# EAGLE board output (EAGLE 6.2)
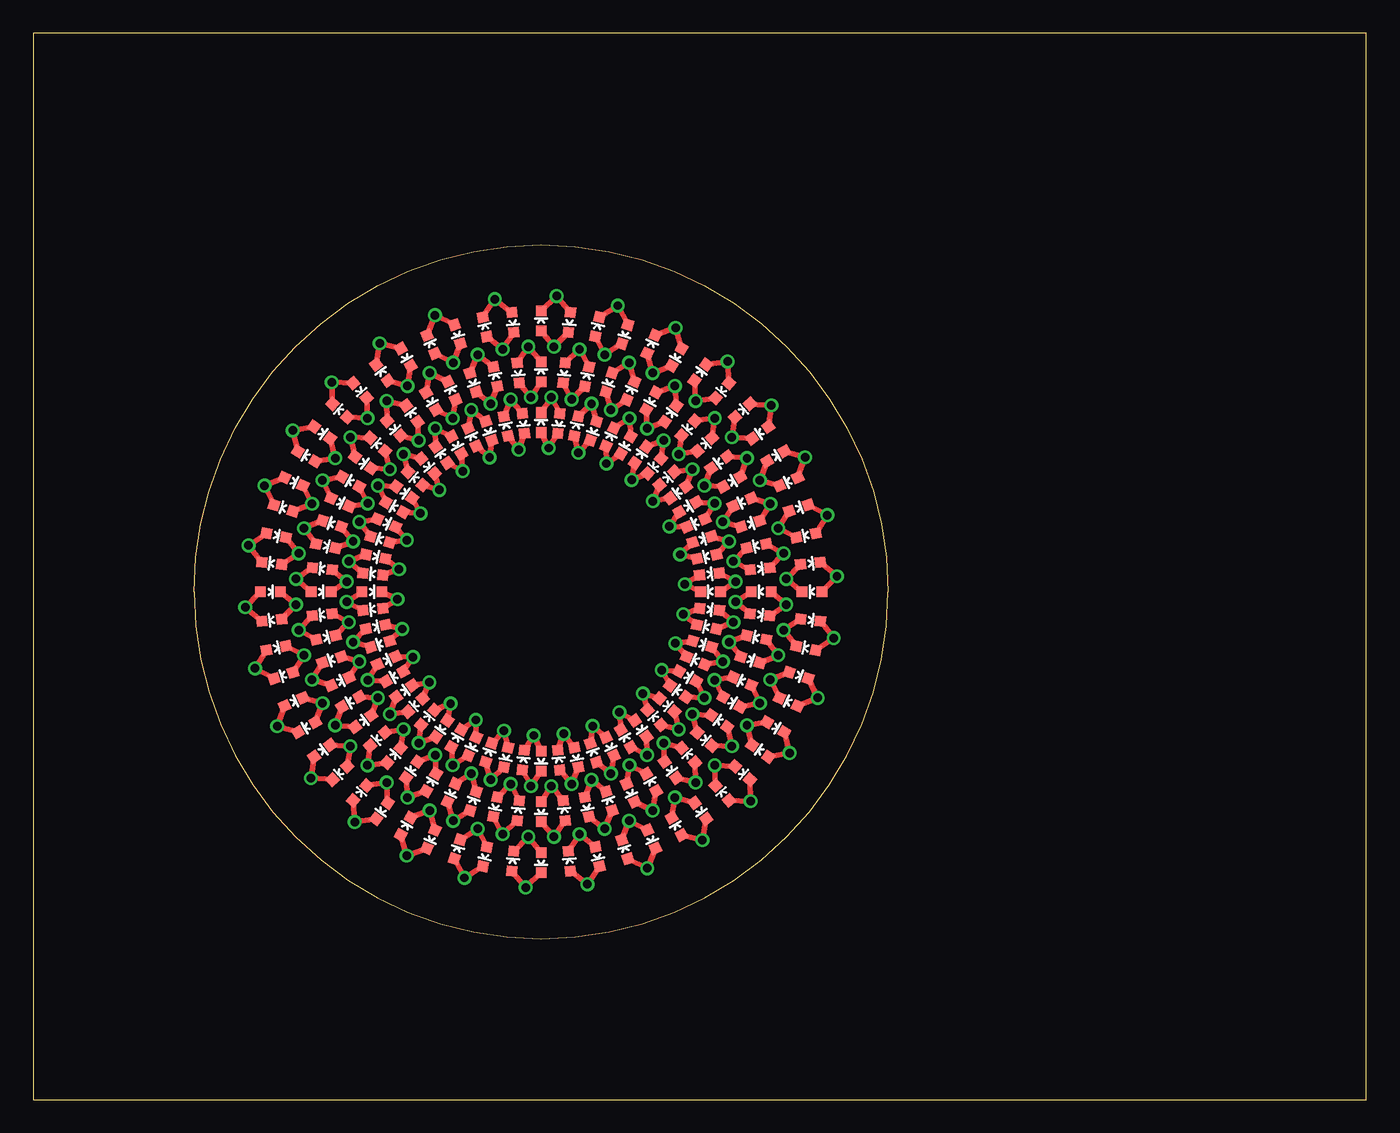
[diagram p0: board, top side]
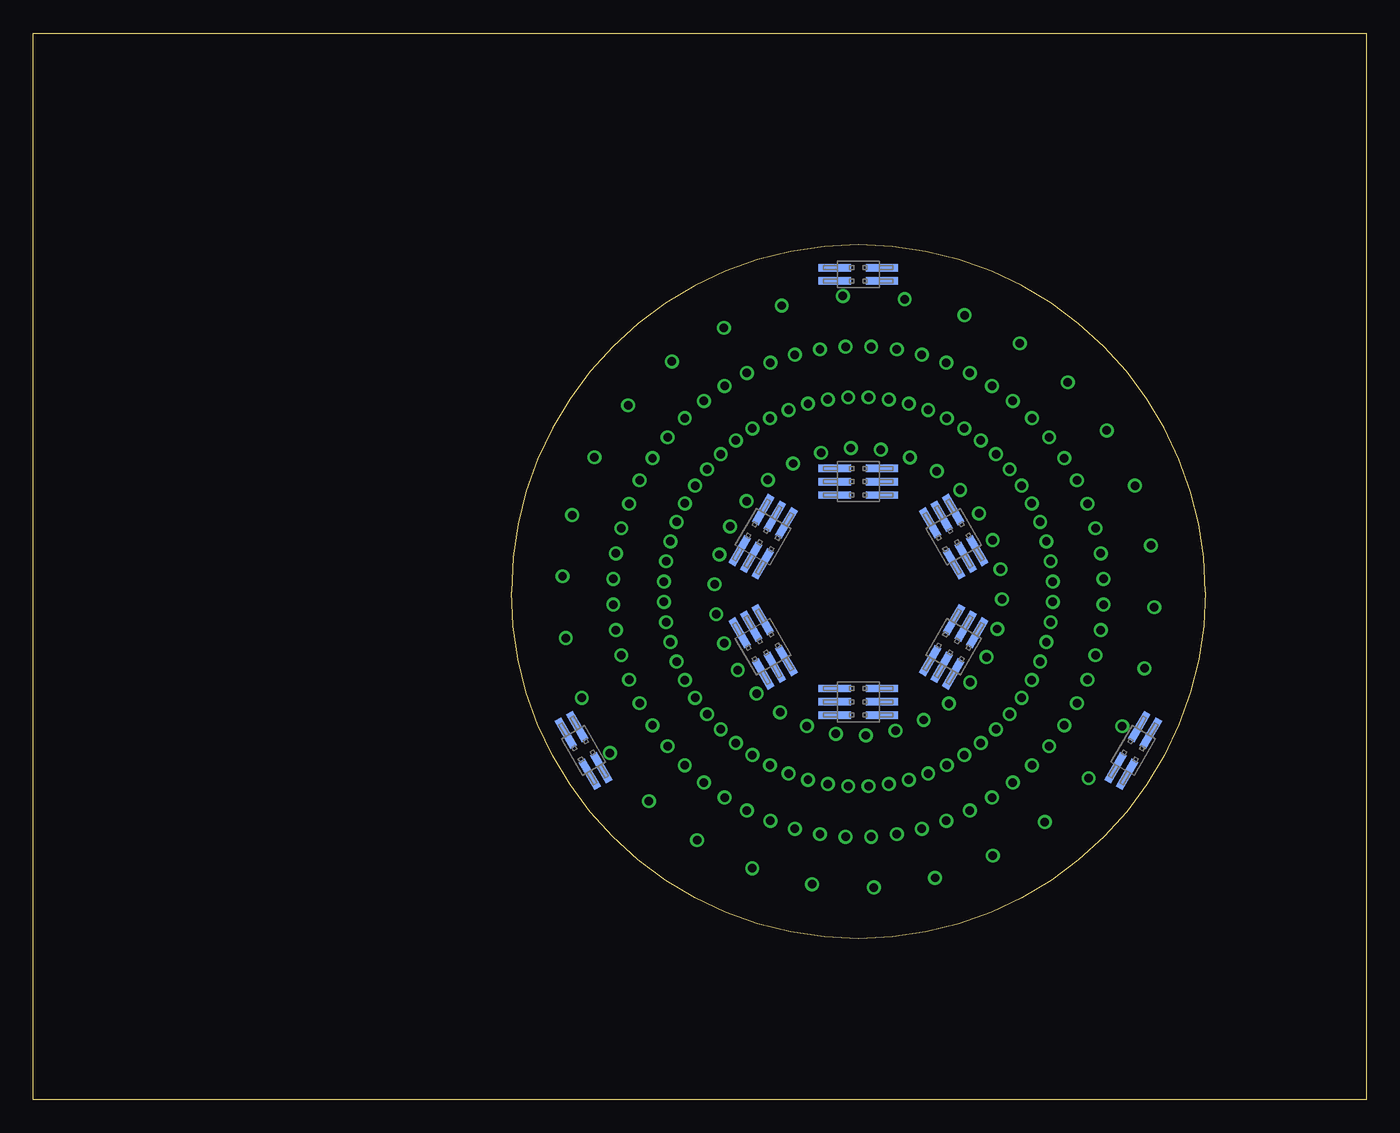
[diagram p1: board, bottom side, seen from below]

Size 100 x 80 mm. Coordinates in mm from the lower left corner, seen from the top.
Outline: 0,0 100,0 100,80 0,80 0,0
Outline: 12.06,38.1 arc180 64.14,38.1 arc180 12.06,38.1
Copper layers (1*16): Top 0.035mm / dielectric 1.5mm / Bottom 0.035mm
Design rules: minimum track width 10mil, minimum drill 24mil, track to track 8mil, track to pad 8mil, pad to pad 8mil, via to via 8mil, smd to smd 8mil, copper to edge 40mil, drill to drill 8mil, minimum pad ring 10mil, minimum via ring 8mil, stop-mask expansion 4mil, vias tented up to drill 0mil, thermal gap 10mil

## Footprints (pad centres in the part's own frame; a part is rotated, then mirrored left to right if it is on the bottom)
3X2_1MM_SMD = smd 2.413 x 0.559: P1 -1.778,1; P2 -1.778,0; P3 -1.778,-1; P4 1.778,-1; P5 1.778,0; P6 1.778,1
2X2_1MM_SMD = smd 2.413 x 0.559: P1 -1.778,0.5; P2 -1.778,-0.5; P3 1.778,-0.5; P4 1.778,0.5
LED-0603 = smd 0.8 x 0.8: A 0,-0.75; C 0,0.75

## Placement (x,y rotation side)
H1  2X3  [3X2_1MM_SMD]  38.1,46.35 0 bottom
H2  2X3  [3X2_1MM_SMD]  45.25,42.23 60 bottom
H3  2X3  [3X2_1MM_SMD]  45.25,33.97 120 bottom
H4  2X3  [3X2_1MM_SMD]  38.1,29.84 180 bottom
H5  2X3  [3X2_1MM_SMD]  30.95,33.97 240 bottom
H6  2X3  [3X2_1MM_SMD]  30.95,42.23 300 bottom
H7  2X2  [2X2_1MM_SMD]  38.1,61.91 180 bottom
H8  2X2  [2X2_1MM_SMD]  58.72,26.19 300 bottom
H9  2X2  [2X2_1MM_SMD]  17.48,26.19 60 bottom
LED1  RED  [LED-0603]  38.1,50.8 0 top
LED2  RED  [LED-0603]  39.43,50.73 174 top
LED3  RED  [LED-0603]  40.74,50.52 348 top
LED4  RED  [LED-0603]  42.02,50.18 162 top
LED5  RED  [LED-0603]  43.27,49.7 336 top
LED6  RED  [LED-0603]  44.45,49.1 150 top
LED7  RED  [LED-0603]  45.56,48.37 324 top
LED8  RED  [LED-0603]  46.6,47.54 138 top
LED9  RED  [LED-0603]  47.54,46.6 312 top
LED10  RED  [LED-0603]  48.37,45.56 126 top
LED11  RED  [LED-0603]  49.1,44.45 300 top
LED12  RED  [LED-0603]  49.7,43.27 114 top
LED13  RED  [LED-0603]  50.18,42.02 288 top
LED14  RED  [LED-0603]  50.52,40.74 102 top
LED15  RED  [LED-0603]  50.73,39.43 276 top
LED16  RED  [LED-0603]  50.8,38.1 90 top
LED17  RED  [LED-0603]  50.73,36.77 264 top
LED18  RED  [LED-0603]  50.52,35.46 78 top
LED19  RED  [LED-0603]  50.18,34.18 252 top
LED20  RED  [LED-0603]  49.7,32.93 66 top
LED21  RED  [LED-0603]  49.1,31.75 240 top
LED22  RED  [LED-0603]  48.37,30.64 54 top
LED23  RED  [LED-0603]  47.54,29.6 228 top
LED24  RED  [LED-0603]  46.6,28.66 42 top
LED25  RED  [LED-0603]  45.56,27.83 216 top
LED26  RED  [LED-0603]  44.45,27.1 30 top
LED27  RED  [LED-0603]  43.27,26.5 204 top
LED28  RED  [LED-0603]  42.02,26.02 18 top
LED29  RED  [LED-0603]  40.74,25.68 192 top
LED30  RED  [LED-0603]  39.43,25.47 6 top
LED31  RED  [LED-0603]  38.1,25.4 180 top
LED32  RED  [LED-0603]  36.77,25.47 354 top
LED33  RED  [LED-0603]  35.46,25.68 168 top
LED34  RED  [LED-0603]  34.18,26.02 342 top
LED35  RED  [LED-0603]  32.93,26.5 156 top
LED36  RED  [LED-0603]  31.75,27.1 330 top
LED37  RED  [LED-0603]  30.64,27.83 144 top
LED38  RED  [LED-0603]  29.6,28.66 318 top
LED39  RED  [LED-0603]  28.66,29.6 132 top
LED40  RED  [LED-0603]  27.83,30.64 306 top
LED41  RED  [LED-0603]  27.1,31.75 120 top
LED42  RED  [LED-0603]  26.5,32.93 294 top
LED43  RED  [LED-0603]  26.02,34.18 108 top
LED44  RED  [LED-0603]  25.68,35.46 282 top
LED45  RED  [LED-0603]  25.47,36.77 96 top
LED46  RED  [LED-0603]  25.4,38.1 270 top
LED47  RED  [LED-0603]  25.47,39.43 84 top
LED48  RED  [LED-0603]  25.68,40.74 258 top
LED49  RED  [LED-0603]  26.02,42.02 72 top
LED50  RED  [LED-0603]  26.5,43.27 246 top
LED51  RED  [LED-0603]  27.1,44.45 60 top
LED52  RED  [LED-0603]  27.83,45.56 234 top
LED53  RED  [LED-0603]  28.66,46.6 48 top
LED54  RED  [LED-0603]  29.6,47.54 222 top
LED55  RED  [LED-0603]  30.64,48.37 36 top
LED56  RED  [LED-0603]  31.75,49.1 210 top
LED57  RED  [LED-0603]  32.93,49.7 24 top
LED58  RED  [LED-0603]  34.18,50.18 198 top
LED59  RED  [LED-0603]  35.46,50.52 12 top
LED60  RED  [LED-0603]  36.77,50.73 186 top
LED61  GREEN  [LED-0603]  38.1,54.61 0 top
LED62  GREEN  [LED-0603]  39.83,54.52 174 top
LED63  GREEN  [LED-0603]  41.53,54.25 348 top
LED64  GREEN  [LED-0603]  43.2,53.8 162 top
LED65  GREEN  [LED-0603]  44.82,53.18 336 top
LED66  GREEN  [LED-0603]  46.35,52.4 150 top
LED67  GREEN  [LED-0603]  47.8,51.46 324 top
LED68  GREEN  [LED-0603]  49.15,50.37 138 top
LED69  GREEN  [LED-0603]  50.37,49.15 312 top
LED70  GREEN  [LED-0603]  51.46,47.8 126 top
LED71  GREEN  [LED-0603]  52.4,46.35 300 top
LED72  GREEN  [LED-0603]  53.18,44.82 114 top
LED73  GREEN  [LED-0603]  53.8,43.2 288 top
LED74  GREEN  [LED-0603]  54.25,41.53 102 top
LED75  GREEN  [LED-0603]  54.52,39.83 276 top
LED76  GREEN  [LED-0603]  54.61,38.1 90 top
LED77  GREEN  [LED-0603]  54.52,36.37 264 top
LED78  GREEN  [LED-0603]  54.25,34.67 78 top
LED79  GREEN  [LED-0603]  53.8,33 252 top
LED80  GREEN  [LED-0603]  53.18,31.38 66 top
LED81  GREEN  [LED-0603]  52.4,29.84 240 top
LED82  GREEN  [LED-0603]  51.46,28.4 54 top
LED83  GREEN  [LED-0603]  50.37,27.05 228 top
LED84  GREEN  [LED-0603]  49.15,25.83 42 top
LED85  GREEN  [LED-0603]  47.8,24.74 216 top
LED86  GREEN  [LED-0603]  46.35,23.8 30 top
LED87  GREEN  [LED-0603]  44.82,23.02 204 top
LED88  GREEN  [LED-0603]  43.2,22.4 18 top
LED89  GREEN  [LED-0603]  41.53,21.95 192 top
LED90  GREEN  [LED-0603]  39.83,21.68 6 top
LED91  GREEN  [LED-0603]  38.1,21.59 180 top
LED92  GREEN  [LED-0603]  36.37,21.68 354 top
LED93  GREEN  [LED-0603]  34.67,21.95 168 top
LED94  GREEN  [LED-0603]  33,22.4 342 top
LED95  GREEN  [LED-0603]  31.38,23.02 156 top
LED96  GREEN  [LED-0603]  29.84,23.8 330 top
LED97  GREEN  [LED-0603]  28.4,24.74 144 top
LED98  GREEN  [LED-0603]  27.05,25.83 318 top
LED99  GREEN  [LED-0603]  25.83,27.05 132 top
LED100  GREEN  [LED-0603]  24.74,28.4 306 top
LED101  GREEN  [LED-0603]  23.8,29.84 120 top
LED102  GREEN  [LED-0603]  23.02,31.38 294 top
LED103  GREEN  [LED-0603]  22.4,33 108 top
LED104  GREEN  [LED-0603]  21.95,34.67 282 top
LED105  GREEN  [LED-0603]  21.68,36.37 96 top
LED106  GREEN  [LED-0603]  21.59,38.1 270 top
LED107  GREEN  [LED-0603]  21.68,39.83 84 top
LED108  GREEN  [LED-0603]  21.95,41.53 258 top
LED109  GREEN  [LED-0603]  22.4,43.2 72 top
LED110  GREEN  [LED-0603]  23.02,44.82 246 top
LED111  GREEN  [LED-0603]  23.8,46.35 60 top
LED112  GREEN  [LED-0603]  24.74,47.8 234 top
LED113  GREEN  [LED-0603]  25.83,49.15 48 top
LED114  GREEN  [LED-0603]  27.05,50.37 222 top
LED115  GREEN  [LED-0603]  28.4,51.46 36 top
LED116  GREEN  [LED-0603]  29.84,52.4 210 top
LED117  GREEN  [LED-0603]  31.38,53.18 24 top
LED118  GREEN  [LED-0603]  33,53.8 198 top
LED119  GREEN  [LED-0603]  34.67,54.25 12 top
LED120  GREEN  [LED-0603]  36.37,54.52 186 top
LED121  BLUE  [LED-0603]  38.1,58.42 0 top
LED122  BLUE  [LED-0603]  40.22,58.31 174 top
LED123  BLUE  [LED-0603]  42.32,57.98 348 top
LED124  BLUE  [LED-0603]  44.38,57.43 162 top
LED125  BLUE  [LED-0603]  46.36,56.66 336 top
LED126  BLUE  [LED-0603]  48.26,55.7 150 top
LED127  BLUE  [LED-0603]  50.04,54.54 324 top
LED128  BLUE  [LED-0603]  51.7,53.2 138 top
LED129  BLUE  [LED-0603]  53.2,51.7 312 top
LED130  BLUE  [LED-0603]  54.54,50.04 126 top
LED131  BLUE  [LED-0603]  55.7,48.26 300 top
LED132  BLUE  [LED-0603]  56.66,46.36 114 top
LED133  BLUE  [LED-0603]  57.43,44.38 288 top
LED134  BLUE  [LED-0603]  57.98,42.32 102 top
LED135  BLUE  [LED-0603]  58.31,40.22 276 top
LED136  BLUE  [LED-0603]  58.42,38.1 90 top
LED137  BLUE  [LED-0603]  58.31,35.98 264 top
LED138  BLUE  [LED-0603]  57.98,33.88 78 top
LED139  BLUE  [LED-0603]  57.43,31.82 252 top
LED140  BLUE  [LED-0603]  56.66,29.84 66 top
LED141  BLUE  [LED-0603]  55.7,27.94 240 top
LED142  BLUE  [LED-0603]  54.54,26.16 54 top
LED143  BLUE  [LED-0603]  53.2,24.5 228 top
LED144  BLUE  [LED-0603]  51.7,23 42 top
LED145  BLUE  [LED-0603]  50.04,21.66 216 top
LED146  BLUE  [LED-0603]  48.26,20.5 30 top
LED147  BLUE  [LED-0603]  46.36,19.54 204 top
LED148  BLUE  [LED-0603]  44.38,18.77 18 top
LED149  BLUE  [LED-0603]  42.32,18.22 192 top
LED150  BLUE  [LED-0603]  40.22,17.89 6 top
LED151  BLUE  [LED-0603]  38.1,17.78 180 top
LED152  BLUE  [LED-0603]  35.98,17.89 354 top
LED153  BLUE  [LED-0603]  33.88,18.22 168 top
LED154  BLUE  [LED-0603]  31.82,18.77 342 top
LED155  BLUE  [LED-0603]  29.84,19.54 156 top
LED156  BLUE  [LED-0603]  27.94,20.5 330 top
LED157  BLUE  [LED-0603]  26.16,21.66 144 top
LED158  BLUE  [LED-0603]  24.5,23 318 top
LED159  BLUE  [LED-0603]  23,24.5 132 top
LED160  BLUE  [LED-0603]  21.66,26.16 306 top
LED161  BLUE  [LED-0603]  20.5,27.94 120 top
LED162  BLUE  [LED-0603]  19.54,29.84 294 top
LED163  BLUE  [LED-0603]  18.77,31.82 108 top
LED164  BLUE  [LED-0603]  18.22,33.88 282 top
LED165  BLUE  [LED-0603]  17.89,35.98 96 top
LED166  BLUE  [LED-0603]  17.78,38.1 270 top
LED167  BLUE  [LED-0603]  17.89,40.22 84 top
LED168  BLUE  [LED-0603]  18.22,42.32 258 top
LED169  BLUE  [LED-0603]  18.77,44.38 72 top
LED170  BLUE  [LED-0603]  19.54,46.36 246 top
LED171  BLUE  [LED-0603]  20.5,48.26 60 top
LED172  BLUE  [LED-0603]  21.66,50.04 234 top
LED173  BLUE  [LED-0603]  23,51.7 48 top
LED174  BLUE  [LED-0603]  24.5,53.2 222 top
LED175  BLUE  [LED-0603]  26.16,54.54 36 top
LED176  BLUE  [LED-0603]  27.94,55.7 210 top
LED177  BLUE  [LED-0603]  29.84,56.66 24 top
LED178  BLUE  [LED-0603]  31.82,57.43 198 top
LED179  BLUE  [LED-0603]  33.88,57.98 12 top
LED180  BLUE  [LED-0603]  35.98,58.31 186 top

## Library data of the parts
H1-H9 LED1-LED180 = Customs

## Nets
N$1: LED1.A LED2.C
N$2: LED3.A LED4.C
N$3: LED5.A LED6.C
N$4: LED7.A LED8.C
N$5: LED9.A LED10.C
N$6: LED11.A LED12.C
N$7: LED13.A LED14.C
N$8: LED15.A LED16.C
N$9: LED17.A LED18.C
N$10: LED19.A LED20.C
N$11: LED21.A LED22.C
N$12: LED23.A LED24.C
N$13: LED25.A LED26.C
N$14: LED27.A LED28.C
N$15: LED29.A LED30.C
N$16: LED31.A LED32.C
N$17: LED33.A LED34.C
N$18: LED35.A LED36.C
N$19: LED37.A LED38.C
N$20: LED39.A LED40.C
N$21: LED41.A LED42.C
N$22: LED43.A LED44.C
N$23: LED45.A LED46.C
N$24: LED47.A LED48.C
N$25: LED49.A LED50.C
N$26: LED51.A LED52.C
N$27: LED53.A LED54.C
N$28: LED55.A LED56.C
N$29: LED57.A LED58.C
N$30: LED59.A LED60.C
N$31: LED62.C LED63.A
N$32: LED64.C LED65.A
N$33: LED66.C LED67.A
N$34: LED68.C LED69.A
N$35: LED70.C LED71.A
N$36: LED72.C LED73.A
N$37: LED74.C LED75.A
N$38: LED76.C LED77.A
N$39: LED78.C LED79.A
N$40: LED80.C LED81.A
N$41: LED82.C LED83.A
N$42: LED84.C LED85.A
N$43: LED86.C LED87.A
N$44: LED88.C LED89.A
N$45: LED90.C LED91.A
N$46: LED92.C LED93.A
N$47: LED94.C LED95.A
N$48: LED96.C LED97.A
N$49: LED98.C LED99.A
N$50: LED100.C LED101.A
N$51: LED102.C LED103.A
N$52: LED104.C LED105.A
N$53: LED106.C LED107.A
N$54: LED108.C LED109.A
N$55: LED110.C LED111.A
N$56: LED112.C LED113.A
N$57: LED114.C LED115.A
N$58: LED116.C LED117.A
N$59: LED118.C LED119.A
N$60: LED61.A LED120.C
N$61: LED121.A LED122.C
N$62: LED123.A LED124.C
N$63: LED125.A LED126.C
N$64: LED127.A LED128.C
N$65: LED129.A LED130.C
N$66: LED131.A LED132.C
N$67: LED133.A LED134.C
N$68: LED135.A LED136.C
N$69: LED137.A LED138.C
N$70: LED139.A LED140.C
N$71: LED141.A LED142.C
N$72: LED143.A LED144.C
N$73: LED145.A LED146.C
N$74: LED147.A LED148.C
N$75: LED149.A LED150.C
N$76: LED151.A LED152.C
N$77: LED153.A LED154.C
N$78: LED155.A LED156.C
N$79: LED157.A LED158.C
N$80: LED159.A LED160.C
N$81: LED161.A LED162.C
N$82: LED163.A LED164.C
N$83: LED165.A LED166.C
N$84: LED167.A LED168.C
N$85: LED169.A LED170.C
N$86: LED171.A LED172.C
N$87: LED173.A LED174.C
N$88: LED175.A LED176.C
N$89: LED177.A LED178.C
N$90: LED179.A LED180.C
N$91: LED1.C LED2.A
N$92: LED3.C LED4.A
N$93: LED5.C LED6.A
N$94: LED7.C LED8.A
N$95: LED9.C LED10.A
N$96: LED11.C LED12.A
N$97: LED13.C LED14.A
N$98: LED15.C LED16.A
N$99: LED17.C LED18.A
N$100: LED19.C LED20.A
N$101: LED21.C LED22.A
N$102: LED23.C LED24.A
N$103: LED25.C LED26.A
N$104: LED27.C LED28.A
N$105: LED29.C LED30.A
N$106: LED31.C LED32.A
N$107: LED33.C LED34.A
N$108: LED35.C LED36.A
N$109: LED37.C LED38.A
N$110: LED39.C LED40.A
N$111: LED41.C LED42.A
N$112: LED43.C LED44.A
N$113: LED45.C LED46.A
N$114: LED47.C LED48.A
N$115: LED49.C LED50.A
N$116: LED51.C LED52.A
N$117: LED53.C LED54.A
N$118: LED55.C LED56.A
N$119: LED57.C LED58.A
N$120: LED59.C LED60.A
N$121: LED62.A LED63.C
N$122: LED64.A LED65.C
N$123: LED66.A LED67.C
N$124: LED68.A LED69.C
N$125: LED70.A LED71.C
N$126: LED72.A LED73.C
N$127: LED74.A LED75.C
N$128: LED76.A LED77.C
N$129: LED78.A LED79.C
N$130: LED80.A LED81.C
N$131: LED82.A LED83.C
N$132: LED84.A LED85.C
N$133: LED86.A LED87.C
N$134: LED88.A LED89.C
N$135: LED90.A LED91.C
N$136: LED92.A LED93.C
N$137: LED94.A LED95.C
N$138: LED96.A LED97.C
N$139: LED98.A LED99.C
N$140: LED100.A LED101.C
N$141: LED102.A LED103.C
N$142: LED104.A LED105.C
N$143: LED106.A LED107.C
N$144: LED108.A LED109.C
N$145: LED110.A LED111.C
N$146: LED112.A LED113.C
N$147: LED114.A LED115.C
N$148: LED116.A LED117.C
N$149: LED118.A LED119.C
N$150: LED61.C LED120.A
N$151: LED121.C LED122.A
N$152: LED123.C LED124.A
N$153: LED125.C LED126.A
N$154: LED127.C LED128.A
N$155: LED129.C LED130.A
N$156: LED131.C LED132.A
N$157: LED133.C LED134.A
N$158: LED135.C LED136.A
N$159: LED137.C LED138.A
N$160: LED139.C LED140.A
N$161: LED141.C LED142.A
N$162: LED143.C LED144.A
N$163: LED145.C LED146.A
N$164: LED147.C LED148.A
N$165: LED149.C LED150.A
N$166: LED151.C LED152.A
N$167: LED153.C LED154.A
N$168: LED155.C LED156.A
N$169: LED157.C LED158.A
N$170: LED159.C LED160.A
N$171: LED161.C LED162.A
N$172: LED163.C LED164.A
N$173: LED165.C LED166.A
N$174: LED167.C LED168.A
N$175: LED169.C LED170.A
N$176: LED171.C LED172.A
N$177: LED173.C LED174.A
N$178: LED175.C LED176.A
N$179: LED177.C LED178.A
N$180: LED179.C LED180.A

## Tracks (layer width: path | path; a pad name or v marks a point on that pad's centre or on a via)
N$1  (via drill 0.64)
  Top 0.406: LED1.A v38.66,48.88 LED2.C
N$2  (via drill 0.64)
  Top 0.406: LED3.A v40.89,48.53 LED4.C
N$3  (via drill 0.64)
  Top 0.406: LED5.A v43,47.72 LED6.C
N$4  (via drill 0.64)
  Top 0.406: LED7.A v44.89,46.49 LED8.C
N$5  (via drill 0.64)
  Top 0.406: LED9.A v46.49,44.89 LED10.C
N$6  (via drill 0.64)
  Top 0.406: LED11.A v47.72,43 LED12.C
N$7  (via drill 0.64)
  Top 0.406: LED13.A v48.53,40.89 LED14.C
N$8  (via drill 0.64)
  Top 0.406: LED15.A v48.88,38.66 LED16.C
N$9  (via drill 0.64)
  Top 0.406: LED17.A v48.76,36.41 LED18.C
N$10  (via drill 0.64)
  Top 0.406: LED19.A v48.18,34.23 LED20.C
N$11  (via drill 0.64)
  Top 0.406: LED21.A v47.15,32.22 LED22.C
N$12  (via drill 0.64)
  Top 0.406: LED23.A v45.73,30.47 LED24.C
N$13  (via drill 0.64)
  Top 0.406: LED25.A v43.98,29.05 LED26.C
N$14  (via drill 0.64)
  Top 0.406: LED27.A v41.97,28.02 LED28.C
N$15  (via drill 0.64)
  Top 0.406: LED29.A v39.79,27.44 LED30.C
N$16  (via drill 0.64)
  Top 0.406: LED31.A v37.53,27.32 LED32.C
N$17  (via drill 0.64)
  Top 0.406: LED33.A v35.31,27.67 LED34.C
N$18  (via drill 0.64)
  Top 0.406: LED35.A v33.2,28.48 LED36.C
N$19  (via drill 0.64)
  Top 0.406: LED37.A v31.31,29.71 LED38.C
N$20  (via drill 0.64)
  Top 0.406: LED39.A v29.71,31.31 LED40.C
N$21  (via drill 0.64)
  Top 0.406: LED41.A v28.48,33.2 LED42.C
N$22  (via drill 0.64)
  Top 0.406: LED43.A v27.67,35.31 LED44.C
N$23  (via drill 0.64)
  Top 0.406: LED45.A v27.32,37.53 LED46.C
N$24  (via drill 0.64)
  Top 0.406: LED47.A v27.44,39.79 LED48.C
N$25  (via drill 0.64)
  Top 0.406: LED49.A v28.02,41.97 LED50.C
N$26  (via drill 0.64)
  Top 0.406: LED51.A v29.05,43.98 LED52.C
N$27  (via drill 0.64)
  Top 0.406: LED53.A v30.47,45.73 LED54.C
N$28  (via drill 0.64)
  Top 0.406: LED55.A v32.22,47.15 LED56.C
N$29  (via drill 0.64)
  Top 0.406: LED57.A v34.23,48.18 LED58.C
N$30  (via drill 0.64)
  Top 0.406: LED59.A v36.41,48.76 LED60.C
N$31  (via drill 0.64)
  Top 0.406: LED62.C v40.38,52.52 LED63.A
N$32  (via drill 0.64)
  Top 0.406: LED64.C v43.33,51.73 LED65.A
N$33  (via drill 0.64)
  Top 0.406: LED66.C v46.05,50.35 LED67.A
N$34  (via drill 0.64)
  Top 0.406: LED68.C v48.43,48.43 LED69.A
N$35  (via drill 0.64)
  Top 0.406: LED70.C v50.35,46.05 LED71.A
N$36  (via drill 0.64)
  Top 0.406: LED72.C v51.73,43.33 LED73.A
N$37  (via drill 0.64)
  Top 0.406: LED74.C v52.52,40.38 LED75.A
N$38  (via drill 0.64)
  Top 0.406: LED76.C v52.69,37.34 LED77.A
N$39  (via drill 0.64)
  Top 0.406: LED78.C v52.21,34.32 LED79.A
N$40  (via drill 0.64)
  Top 0.406: LED80.C v51.11,31.47 LED81.A
N$41  (via drill 0.64)
  Top 0.406: LED82.C v49.45,28.91 LED83.A
N$42  (via drill 0.64)
  Top 0.406: LED84.C v47.29,26.75 LED85.A
N$43  (via drill 0.64)
  Top 0.406: LED86.C v44.73,25.09 LED87.A
N$44  (via drill 0.64)
  Top 0.406: LED88.C v41.88,23.99 LED89.A
N$45  (via drill 0.64)
  Top 0.406: LED90.C v38.86,23.52 LED91.A
N$46  (via drill 0.64)
  Top 0.406: LED92.C v35.81,23.68 LED93.A
N$47  (via drill 0.64)
  Top 0.406: LED94.C v32.87,24.46 LED95.A
N$48  (via drill 0.64)
  Top 0.406: LED96.C v30.15,25.85 LED97.A
N$49  (via drill 0.64)
  Top 0.406: LED98.C v27.77,27.77 LED99.A
N$50  (via drill 0.64)
  Top 0.406: LED100.C v25.85,30.15 LED101.A
N$51  (via drill 0.64)
  Top 0.406: LED102.C v24.46,32.87 LED103.A
N$52  (via drill 0.64)
  Top 0.406: LED104.C v23.68,35.81 LED105.A
N$53  (via drill 0.64)
  Top 0.406: LED106.C v23.52,38.86 LED107.A
N$54  (via drill 0.64)
  Top 0.406: LED108.C v23.99,41.88 LED109.A
N$55  (via drill 0.64)
  Top 0.406: LED110.C v25.09,44.73 LED111.A
N$56  (via drill 0.64)
  Top 0.406: LED112.C v26.75,47.29 LED113.A
N$57  (via drill 0.64)
  Top 0.406: LED114.C v28.91,49.45 LED115.A
N$58  (via drill 0.64)
  Top 0.406: LED116.C v31.47,51.11 LED117.A
N$59  (via drill 0.64)
  Top 0.406: LED118.C v34.32,52.21 LED119.A
N$60  (via drill 0.64)
  Top 0.406: LED120.C v37.34,52.69 LED61.A
N$61  (via drill 0.64)
  Top 0.406: LED121.A v39.06,56.49 LED122.C
N$62  (via drill 0.64)
  Top 0.406: LED123.A v42.87,55.89 LED124.C
N$63  (via drill 0.64)
  Top 0.406: LED125.A v46.46,54.51 LED126.C
N$64  (via drill 0.64)
  Top 0.406: LED127.A v49.69,52.41 LED128.C
N$65  (via drill 0.64)
  Top 0.406: LED129.A v52.41,49.69 LED130.C
N$66  (via drill 0.64)
  Top 0.406: LED131.A v54.51,46.46 LED132.C
N$67  (via drill 0.64)
  Top 0.406: LED133.A v55.89,42.87 LED134.C
N$68  (via drill 0.64)
  Top 0.406: LED135.A v56.49,39.06 LED136.C
N$69  (via drill 0.64)
  Top 0.406: LED137.A v56.29,35.22 LED138.C
N$70  (via drill 0.64)
  Top 0.406: LED139.A v55.29,31.5 LED140.C
N$71  (via drill 0.64)
  Top 0.406: LED141.A v53.54,28.07 LED142.C
N$72  (via drill 0.64)
  Top 0.406: LED143.A v51.12,25.08 LED144.C
N$73  (via drill 0.64)
  Top 0.406: LED145.A v48.13,22.66 LED146.C
N$74  (via drill 0.64)
  Top 0.406: LED147.A v44.7,20.91 LED148.C
N$75  (via drill 0.64)
  Top 0.406: LED149.A v40.98,19.91 LED150.C
N$76  (via drill 0.64)
  Top 0.406: LED151.A v37.14,19.71 LED152.C
N$77  (via drill 0.64)
  Top 0.406: LED153.A v33.33,20.31 LED154.C
N$78  (via drill 0.64)
  Top 0.406: LED155.A v29.74,21.69 LED156.C
N$79  (via drill 0.64)
  Top 0.406: LED157.A v26.51,23.79 LED158.C
N$80  (via drill 0.64)
  Top 0.406: LED159.A v23.79,26.51 LED160.C
N$81  (via drill 0.64)
  Top 0.406: LED161.A v21.69,29.74 LED162.C
N$82  (via drill 0.64)
  Top 0.406: LED163.A v20.31,33.33 LED164.C
N$83  (via drill 0.64)
  Top 0.406: LED165.A v19.71,37.14 LED166.C
N$84  (via drill 0.64)
  Top 0.406: LED167.A v19.91,40.98 LED168.C
N$85  (via drill 0.64)
  Top 0.406: LED169.A v20.91,44.7 LED170.C
N$86  (via drill 0.64)
  Top 0.406: LED171.A v22.66,48.13 LED172.C
N$87  (via drill 0.64)
  Top 0.406: LED173.A v25.08,51.12 LED174.C
N$88  (via drill 0.64)
  Top 0.406: LED175.A v28.07,53.54 LED176.C
N$89  (via drill 0.64)
  Top 0.406: LED177.A v31.5,55.29 LED178.C
N$90  (via drill 0.64)
  Top 0.406: LED179.A v35.22,56.29 LED180.C
N$91  (via drill 0.64)
  Top 0.406: LED1.C v38.86,52.69 LED2.A
N$92  (via drill 0.64)
  Top 0.406: LED3.C v41.88,52.21 LED4.A
N$93  (via drill 0.64)
  Top 0.406: LED5.C v44.73,51.11 LED6.A
N$94  (via drill 0.64)
  Top 0.406: LED7.C v47.29,49.45 LED8.A
N$95  (via drill 0.64)
  Top 0.406: LED9.C v49.45,47.29 LED10.A
N$96  (via drill 0.64)
  Top 0.406: LED11.C v51.11,44.73 LED12.A
N$97  (via drill 0.64)
  Top 0.406: LED13.C v52.21,41.88 LED14.A
N$98  (via drill 0.64)
  Top 0.406: LED15.C v52.69,38.86 LED16.A
N$99  (via drill 0.64)
  Top 0.406: LED17.C v52.52,35.81 LED18.A
N$100  (via drill 0.64)
  Top 0.406: LED19.C v51.73,32.87 LED20.A
N$101  (via drill 0.64)
  Top 0.406: LED21.C v50.35,30.15 LED22.A
N$102  (via drill 0.64)
  Top 0.406: LED23.C v48.43,27.77 LED24.A
N$103  (via drill 0.64)
  Top 0.406: LED25.C v46.05,25.85 LED26.A
N$104  (via drill 0.64)
  Top 0.406: LED27.C v43.33,24.46 LED28.A
N$105  (via drill 0.64)
  Top 0.406: LED29.C v40.38,23.68 LED30.A
N$106  (via drill 0.64)
  Top 0.406: LED31.C v37.34,23.52 LED32.A
N$107  (via drill 0.64)
  Top 0.406: LED33.C v34.32,23.99 LED34.A
N$108  (via drill 0.64)
  Top 0.406: LED35.C v31.47,25.09 LED36.A
N$109  (via drill 0.64)
  Top 0.406: LED37.C v28.91,26.75 LED38.A
N$110  (via drill 0.64)
  Top 0.406: LED39.C v26.75,28.91 LED40.A
N$111  (via drill 0.64)
  Top 0.406: LED41.C v25.09,31.47 LED42.A
N$112  (via drill 0.64)
  Top 0.406: LED43.C v23.99,34.32 LED44.A
N$113  (via drill 0.64)
  Top 0.406: LED45.C v23.52,37.34 LED46.A
N$114  (via drill 0.64)
  Top 0.406: LED47.C v23.68,40.38 LED48.A
N$115  (via drill 0.64)
  Top 0.406: LED49.C v24.46,43.33 LED50.A
N$116  (via drill 0.64)
  Top 0.406: LED51.C v25.85,46.05 LED52.A
N$117  (via drill 0.64)
  Top 0.406: LED53.C v27.77,48.43 LED54.A
N$118  (via drill 0.64)
  Top 0.406: LED55.C v30.15,50.35 LED56.A
N$119  (via drill 0.64)
  Top 0.406: LED57.C v32.87,51.73 LED58.A
N$120  (via drill 0.64)
  Top 0.406: LED59.C v35.81,52.52 LED60.A
N$121  (via drill 0.64)
  Top 0.406: LED62.A v40.98,56.29 LED63.C
N$122  (via drill 0.64)
  Top 0.406: LED64.A v44.7,55.29 LED65.C
N$123  (via drill 0.64)
  Top 0.406: LED66.A v48.13,53.54 LED67.C
N$124  (via drill 0.64)
  Top 0.406: LED68.A v51.12,51.12 LED69.C
N$125  (via drill 0.64)
  Top 0.406: LED70.A v53.54,48.13 LED71.C
N$126  (via drill 0.64)
  Top 0.406: LED72.A v55.29,44.7 LED73.C
N$127  (via drill 0.64)
  Top 0.406: LED74.A v56.29,40.98 LED75.C
N$128  (via drill 0.64)
  Top 0.406: LED76.A v56.49,37.14 LED77.C
N$129  (via drill 0.64)
  Top 0.406: LED78.A v55.89,33.33 LED79.C
N$130  (via drill 0.64)
  Top 0.406: LED80.A v54.51,29.74 LED81.C
N$131  (via drill 0.64)
  Top 0.406: LED82.A v52.41,26.51 LED83.C
N$132  (via drill 0.64)
  Top 0.406: LED84.A v49.69,23.79 LED85.C
N$133  (via drill 0.64)
  Top 0.406: LED86.A v46.46,21.69 LED87.C
N$134  (via drill 0.64)
  Top 0.406: LED88.A v42.87,20.31 LED89.C
N$135  (via drill 0.64)
  Top 0.406: LED90.A v39.06,19.71 LED91.C
N$136  (via drill 0.64)
  Top 0.406: LED92.A v35.22,19.91 LED93.C
N$137  (via drill 0.64)
  Top 0.406: LED94.A v31.5,20.91 LED95.C
N$138  (via drill 0.64)
  Top 0.406: LED96.A v28.07,22.66 LED97.C
N$139  (via drill 0.64)
  Top 0.406: LED98.A v25.08,25.08 LED99.C
N$140  (via drill 0.64)
  Top 0.406: LED100.A v22.66,28.07 LED101.C
N$141  (via drill 0.64)
  Top 0.406: LED102.A v20.91,31.5 LED103.C
N$142  (via drill 0.64)
  Top 0.406: LED104.A v19.91,35.22 LED105.C
N$143  (via drill 0.64)
  Top 0.406: LED106.A v19.71,39.06 LED107.C
N$144  (via drill 0.64)
  Top 0.406: LED108.A v20.31,42.87 LED109.C
N$145  (via drill 0.64)
  Top 0.406: LED110.A v21.69,46.46 LED111.C
N$146  (via drill 0.64)
  Top 0.406: LED112.A v23.79,49.69 LED113.C
N$147  (via drill 0.64)
  Top 0.406: LED114.A v26.51,52.41 LED115.C
N$148  (via drill 0.64)
  Top 0.406: LED116.A v29.74,54.51 LED117.C
N$149  (via drill 0.64)
  Top 0.406: LED118.A v33.33,55.89 LED119.C
N$150  (via drill 0.64)
  Top 0.406: LED120.A v37.14,56.49 LED61.C
N$151  (via drill 0.64)
  Top 0.406: LED121.C v39.26,60.3 LED122.A
N$152  (via drill 0.64)
  Top 0.406: LED123.C v43.85,59.57 LED124.A
N$153  (via drill 0.64)
  Top 0.406: LED125.C v48.19,57.9 LED126.A
N$154  (via drill 0.64)
  Top 0.406: LED127.C v52.09,55.37 LED128.A
N$155  (via drill 0.64)
  Top 0.406: LED129.C v55.37,52.09 LED130.A
N$156  (via drill 0.64)
  Top 0.406: LED131.C v57.9,48.19 LED132.A
N$157  (via drill 0.64)
  Top 0.406: LED133.C v59.57,43.85 LED134.A
N$158  (via drill 0.64)
  Top 0.406: LED135.C v60.3,39.26 LED136.A
N$159  (via drill 0.64)
  Top 0.406: LED137.C v60.05,34.62 LED138.A
N$160  (via drill 0.64)
  Top 0.406: LED139.C v58.85,30.14 LED140.A
N$161  (via drill 0.64)
  Top 0.406: LED141.C v56.74,26 LED142.A
N$162  (via drill 0.64)
  Top 0.406: LED143.C v53.81,22.39 LED144.A
N$163  (via drill 0.64)
  Top 0.406: LED145.C v50.2,19.46 LED146.A
N$164  (via drill 0.64)
  Top 0.406: LED147.C v46.06,17.35 LED148.A
N$165  (via drill 0.64)
  Top 0.406: LED149.C v41.58,16.15 LED150.A
N$166  (via drill 0.64)
  Top 0.406: LED151.C v36.94,15.9 LED152.A
N$167  (via drill 0.64)
  Top 0.406: LED153.C v32.35,16.63 LED154.A
N$168  (via drill 0.64)
  Top 0.406: LED155.C v28.01,18.3 LED156.A
N$169  (via drill 0.64)
  Top 0.406: LED157.C v24.11,20.83 LED158.A
N$170  (via drill 0.64)
  Top 0.406: LED159.C v20.83,24.11 LED160.A
N$171  (via drill 0.64)
  Top 0.406: LED161.C v18.3,28.01 LED162.A
N$172  (via drill 0.64)
  Top 0.406: LED163.C v16.63,32.35 LED164.A
N$173  (via drill 0.64)
  Top 0.406: LED165.C v15.9,36.94 LED166.A
N$174  (via drill 0.64)
  Top 0.406: LED167.C v16.15,41.58 LED168.A
N$175  (via drill 0.64)
  Top 0.406: LED169.C v17.35,46.06 LED170.A
N$176  (via drill 0.64)
  Top 0.406: LED171.C v19.46,50.2 LED172.A
N$177  (via drill 0.64)
  Top 0.406: LED173.C v22.39,53.81 LED174.A
N$178  (via drill 0.64)
  Top 0.406: LED175.C v26,56.74 LED176.A
N$179  (via drill 0.64)
  Top 0.406: LED177.C v30.14,58.85 LED178.A
N$180  (via drill 0.64)
  Top 0.406: LED179.C v34.62,60.05 LED180.A